# EAGLE board production (EAGLE 9.6.2)
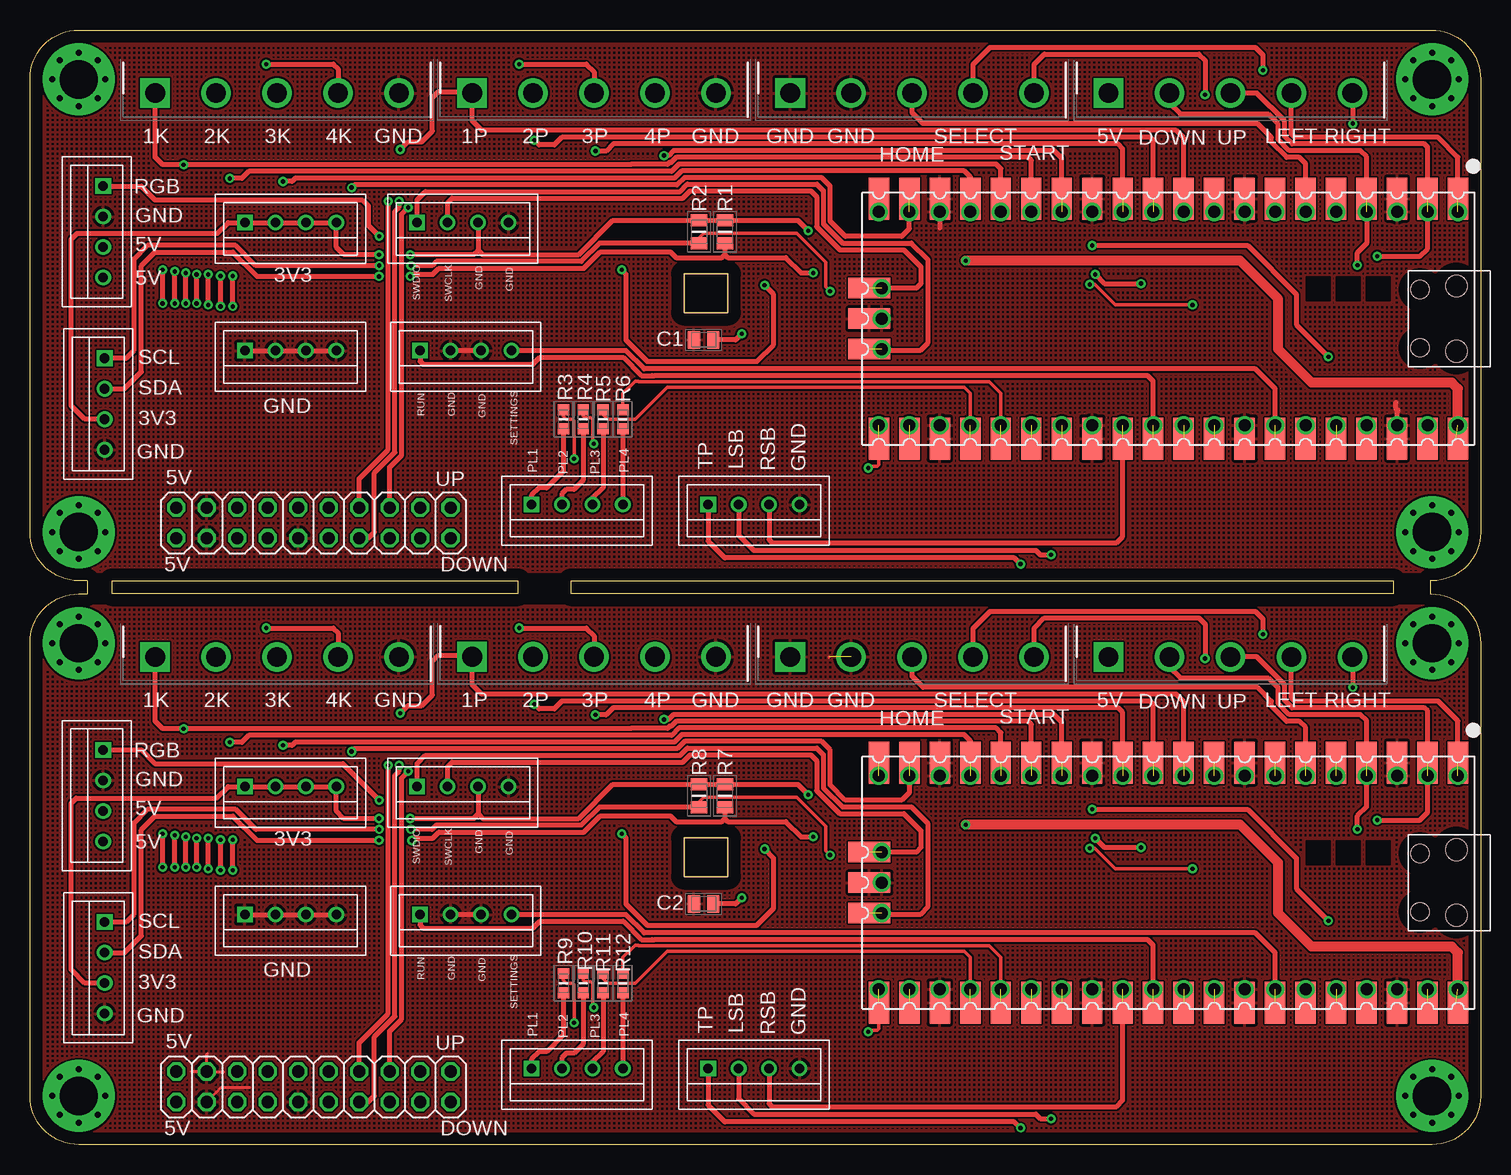
[diagram p0: board, top side]
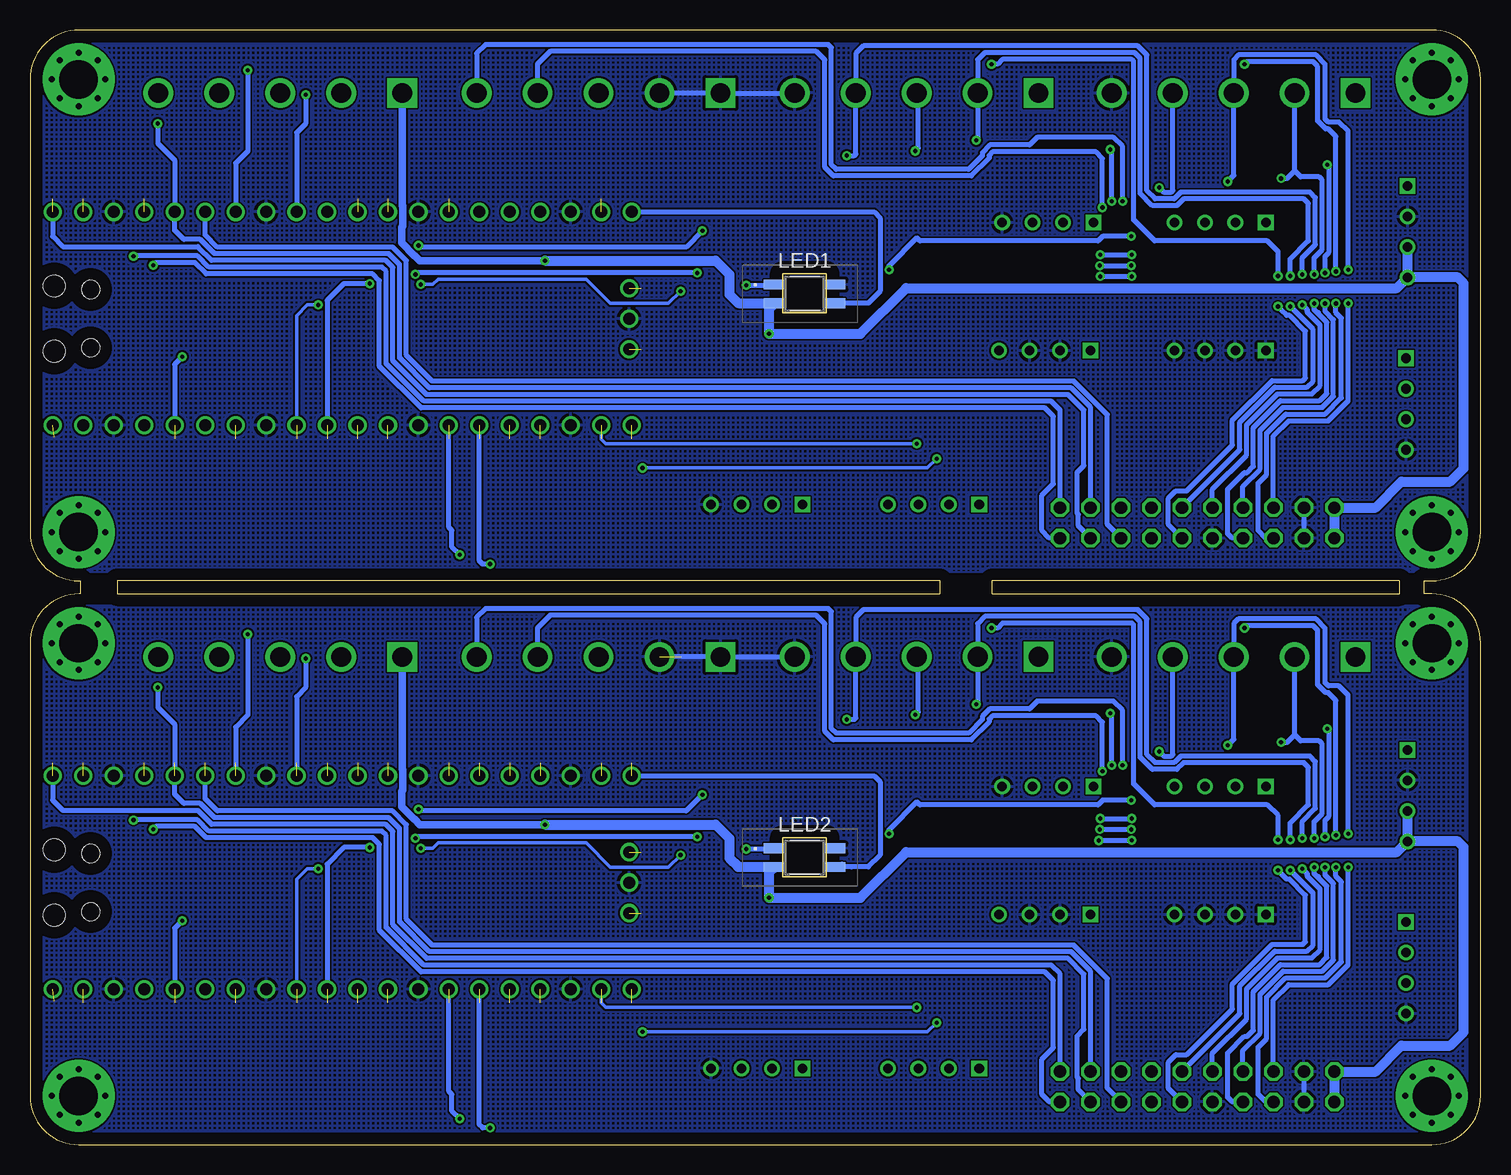
[diagram p1: board, bottom side, seen from below]

Size 120.89 x 92.89 mm. Coordinates in mm from the lower left corner, seen from the top.
Outline: 0,88.82 arc-90 4.06,92.89 116.78,92.89 arc-90 120.89,88.77 120.89,51.04 arc-90 116.84,46.99 116.7,46.99 116.7,45.9 116.78,45.9 arc-90 120.89,41.78 120.89,4.05 arc-90 116.84,0 4.06,0 arc-90 0,4.06 0,41.83 arc-90 4.06,45.9 4.76,45.9 4.76,46.99 4.06,46.99 arc-90 0,51.05 0,88.82
Outline: 6.79,46.99 40.7,46.99 40.7,45.9 6.79,45.9 6.79,46.99
Outline: 45.07,46.99 113.61,46.99 113.61,45.9 45.07,45.9 45.07,46.99
Copper layers (1*16): Top 0.035mm / dielectric 1.5mm / Bottom 0.035mm
Design rules "default *": minimum track width 12mil, minimum drill 0.35mm, track to track 6mil, track to pad 6mil, pad to pad 6mil, via to via 6mil, smd to smd 6mil, copper to edge 40mil, drill to drill 6mil, minimum pad ring 10mil, minimum via ring 8mil, stop-mask expansion 4mil, vias tented up to drill 0.36mm, thermal gap 10mil

## Footprints (pad centres in the part's own frame; a part is rotated, then mirrored left to right if it is on the bottom)
CAPC2012X94N = smd 1.02 x 1.47: 1 -0.81,0; 2 0.81,0
3MM_HOLE = drill 3.2 pad 6: P$1 0,0 | drill 0.5 pad 0.61: P$2 0,2.223; P$3 0,-2.223; P$4 2.223,0; P$5 -2.223,0; P$6 -1.587,1.587; P$7 1.587,1.587; P$8 1.587,-1.587; P$9 -1.587,-1.587
SHDRRA5W103P0X508_1X5_2540X120 = drill 1.65 pad 2.475 square: 1 0,0 | drill 1.65 pad 2.475: 2 5.08,0; 3 10.16,0; 4 15.24,0; 5 20.32,0
2X10 = drill 1.016 octagon: 1 -11.43,-1.27; 2 -11.43,1.27; 3 -8.89,-1.27; 4 -8.89,1.27; 5 -6.35,-1.27; 6 -6.35,1.27; 7 -3.81,-1.27; 8 -3.81,1.27; 9 -1.27,-1.27; 10 -1.27,1.27; 11 1.27,-1.27; 12 1.27,1.27; 13 3.81,-1.27; 14 3.81,1.27; 15 6.35,-1.27; 16 6.35,1.27; 17 8.89,-1.27; 18 8.89,1.27; 19 11.43,-1.27; 20 11.43,1.27
SK6812MINIE = smd 1.8 x 0.82: 1 -2.5,-0.774; 2 -2.5,0.774; 3 2.5,0.774; 4 2.5,-0.774
RESC2012X60N = smd 1 x 1.4: 1 -0.95,0; 2 0.95,0
RESC1608X55N = smd 0.9 x 0.95: 1 -0.8,0; 2 0.8,0
PICO-PKG = drill 1: 1 -8.89,24.13; 2 -8.89,21.59; 3 -8.89,19.05; 4 -8.89,16.51; 5 -8.89,13.97; 6 -8.89,11.43; 7 -8.89,8.89; 8 -8.89,6.35; 9 -8.89,3.81; 10 -8.89,1.27; 11 -8.89,-1.27; 12 -8.89,-3.81; 13 -8.89,-6.35; 14 -8.89,-8.89; 15 -8.89,-11.43; 16 -8.89,-13.97; 17 -8.89,-16.51; 18 -8.89,-19.05; 19 -8.89,-21.59; 20 -8.89,-24.13; 21 8.89,-24.13; 22 8.89,-21.59; 23 8.89,-19.05; 24 8.89,-16.51; 25 8.89,-13.97; 26 8.89,-11.43; 27 8.89,-8.89; 28 8.89,-6.35; 29 8.89,-3.81; 30 8.89,-1.27; 31 8.89,1.27; 32 8.89,3.81; 33 8.89,6.35; 34 8.89,8.89; 35 8.89,11.43; 36 8.89,13.97; 37 8.89,16.51; 38 8.89,19.05; 39 8.89,21.59; 40 8.89,24.13; 41 -2.54,-23.9; 42 0,-23.9; 43 2.54,-23.9 | smd 3.5 x 1.7: P$1 -10,24.13; P$2 -10,21.59; P$3 -10,19.05; P$4 -10,16.51; P$5 -10,13.97; P$6 -10,11.43; P$7 -10,8.89; P$8 -10,6.35; P$9 -10,3.81; P$10 -10,1.27; P$11 -10,-1.27; P$12 -10,-3.81; P$13 -10,-6.35; P$14 -10,-8.89; P$15 -10,-11.43; P$16 -10,-13.97; P$17 -10,-16.51; P$18 -10,-19.05; P$19 -10,-21.59; P$20 -10,-24.13; P$21 10,-24.13; P$22 10,-21.59; P$23 10,-19.05; P$24 10,-16.51; P$25 10,-13.97; P$26 10,-11.43; P$27 10,-8.89; P$28 10,-6.35; P$29 10,-3.81; P$30 10,-1.27; P$31 10,1.27; P$32 10,3.81; P$33 10,6.35; P$34 10,8.89; P$35 10,11.43; P$36 10,13.97; P$37 10,16.51; P$38 10,19.05; P$39 10,21.59; P$40 10,24.13 | smd 1.7 x 3.5: P$41 -2.54,-24.925; P$42 0,-24.925; P$43 2.54,-24.925 | hole 1.8: -2.725,24; 2.725,24 | hole 1.5: -2.425,20.97; 2.425,20.97
B4B-XH = drill 0.8 square: P$1 3.81,0 | drill 0.8: P$2 1.27,0; P$3 -1.27,0; P$4 -3.81,0

## Placement (x,y rotation side)
C1  100nf  [CAPC2012X94N]  56.13,67.06 0 top
C2  100nf  [CAPC2012X94N]  56.13,20.07 0 top
H1  3MM_HOLE  [3MM_HOLE]  4.06,51.05 0 top
H2  3MM_HOLE  [3MM_HOLE]  116.84,88.77 0 top
H3  3MM_HOLE  [3MM_HOLE]  116.84,51.05 0 top
H4  3MM_HOLE  [3MM_HOLE]  4.06,88.77 0 top
H5  3MM_HOLE  [3MM_HOLE]  4.06,4.06 0 top
H6  3MM_HOLE  [3MM_HOLE]  116.84,41.78 0 top
H7  3MM_HOLE  [3MM_HOLE]  116.84,4.06 0 top
H8  3MM_HOLE  [3MM_HOLE]  4.06,41.78 0 top
J1  1759046  [SHDRRA5W103P0X508_1X5_2540X120]  10.43,40.64 0 top
J2  1759046  [SHDRRA5W103P0X508_1X5_2540X120]  10.43,87.63 0 top
J3  1759046  [SHDRRA5W103P0X508_1X5_2540X120]  36.84,87.64 0 top
J4  1759046  [SHDRRA5W103P0X508_1X5_2540X120]  63.35,87.63 0 top
J5  1759046  [SHDRRA5W103P0X508_1X5_2540X120]  89.88,87.63 0 top
J6  1759046  [SHDRRA5W103P0X508_1X5_2540X120]  36.84,40.65 0 top
J7  1759046  [SHDRRA5W103P0X508_1X5_2540X120]  63.35,40.64 0 top
J8  1759046  [SHDRRA5W103P0X508_1X5_2540X120]  89.88,40.64 0 top
JP1  [2X10]  23.62,51.82 0 top
JP2  [2X10]  23.62,4.83 0 top
LED1  SK6812MINI-E  [SK6812MINIE]  56.35,70.9 0 bottom
LED2  SK6812MINI-E  [SK6812MINIE]  56.35,23.91 0 bottom
R1  10k  [RESC2012X60N]  57.91,76.07 270 top
R2  10k  [RESC2012X60N]  55.75,76.07 270 top
R3  330  [RESC1608X55N]  44.45,60.45 90 top
R4  330  [RESC1608X55N]  46.1,60.45 90 top
R5  330  [RESC1608X55N]  47.75,60.45 90 top
R6  330  [RESC1608X55N]  49.4,60.45 90 top
R7  10k  [RESC2012X60N]  57.91,29.08 270 top
R8  10k  [RESC2012X60N]  55.75,29.08 270 top
R9  330  [RESC1608X55N]  44.45,13.46 90 top
R10  330  [RESC1608X55N]  46.1,13.46 90 top
R11  330  [RESC1608X55N]  47.75,13.46 90 top
R12  330  [RESC1608X55N]  49.4,13.46 90 top
U1  RASPBERRY_PICOSMD-TH  [PICO-PKG]  94.87,68.83 270 top
U2  RASPBERRY_PICOSMD-TH  [PICO-PKG]  94.87,21.84 270 top
X1  04-JST-B4B-XH-A  [B4B-XH]  36.07,76.83 180 top
X2  04-JST-B4B-XH-A  [B4B-XH]  6.22,61.72 90 top
X3  04-JST-B4B-XH-A  [B4B-XH]  60.33,53.34 180 top
X4  04-JST-B4B-XH-A  [B4B-XH]  36.32,66.17 180 top
X5  04-JST-B4B-XH-A  [B4B-XH]  45.59,53.34 180 top
X6  04-JST-B4B-XH-A  [B4B-XH]  21.72,76.83 180 top
X7  04-JST-B4B-XH-A  [B4B-XH]  21.72,66.17 180 top
X8  04-JST-B4B-XH-A  [B4B-XH]  6.1,76.07 90 top
X9  04-JST-B4B-XH-A  [B4B-XH]  36.07,29.84 180 top
X10  04-JST-B4B-XH-A  [B4B-XH]  6.22,14.73 90 top
X11  04-JST-B4B-XH-A  [B4B-XH]  60.33,6.35 180 top
X12  04-JST-B4B-XH-A  [B4B-XH]  36.32,19.18 180 top
X13  04-JST-B4B-XH-A  [B4B-XH]  45.59,6.35 180 top
X14  04-JST-B4B-XH-A  [B4B-XH]  21.72,29.84 180 top
X15  04-JST-B4B-XH-A  [B4B-XH]  21.72,19.18 180 top
X16  04-JST-B4B-XH-A  [B4B-XH]  6.1,29.08 90 top

## Library data of the parts
C1 C2 = 08055C104K4T2A; DESCRIPTION: AVX - 08055C104K4T2A - SMD Multilayer Ceramic Capacitor, 0.1 F, 50 V, 0805 [2012 Metric], +/- 10%, X7R; HEIGHT: 0.94mm; MANUFACTURER_NAME: Kyocera AVX; MANUFACTURER_PART_NUMBER: 08055C104K4T2A; MOUSER_PART_NUMBER: 581-08055C104K4; MOUSER_PRICE-STOCK: https://www.mouser.co.uk/ProductDetail/KYOCERA-AVX/08055C104K4T2A?qs=xMTsDkQFXIwOG0s%252Bx1urSg%3D%3D
H1-H8 = 3mm_special_hole
J1-J8 = 1759046; DESCRIPTION: PCB header, nominal cross section: 2.5 mm?, color: green, nominal current: 12 A, rated voltage (III/2): 320 V, contact surface: Tin, type of contact: Male connector, Number of potentials: 5, Number of rows: 1, Number of positions per row: 5, number of connections: 5, product range: MSTB 2,5/..-G, pitch: 5.08 mm, mounting: Wave soldering, pin layout: Linear pinning, solder pin [P]: 3.2 mm, Stecksystem: CLASSIC COMBICON, Locking: without, type of packaging: packed in cardboard; HEIGHT: 8.72mm; MANUFACTURER_NAME: Phoenix Contact; MANUFACTURER_PART_NUMBER: 1759046; MOUSER_PART_NUMBER: 651-1759046; MOUSER_PRICE-STOCK: https://www.mouser.co.uk/ProductDetail/Phoenix-Contact/1759046?qs=cyzODkzcbwC75vUJEckceg%3D%3D
JP1 JP2 = pinhead
LED1 LED2 = SK6812MINI-E; DESCRIPTION: 3.2x2.8x1.78 mm 0.2W Intelligent external control surface mount SMD LED (MSL:5a); HEIGHT: 1.88mm; MANUFACTURER_NAME: Yellow Stone Corp.; MANUFACTURER_PART_NUMBER: SK6812MINI-E
R1 R2 R7 R8 = CHP0805-FX-1002ELF; DESCRIPTION: Thick Film Resistors - SMD ResHighPower 0805 10k 1% 1/2W TC100; HEIGHT: 0.6mm; MANUFACTURER_NAME: Bourns; MANUFACTURER_PART_NUMBER: CHP0805-FX-1002ELF; MOUSER_PART_NUMBER: 652-CHP0805FX1002ELF; MOUSER_PRICE-STOCK: https://www.mouser.co.uk/ProductDetail/Bourns/CHP0805-FX-1002ELF?qs=lc2O%252BfHJPVaDI6gsPdDtfw%3D%3D
R3-R6 R9-R12 = CMP0603AFX-3300ELF; DESCRIPTION: Thick Film Resistors - SMD 330 OHM 1% 1/4W TC100; HEIGHT: 0.55mm; MANUFACTURER_NAME: Bourns; MANUFACTURER_PART_NUMBER: CMP0603AFX-3300ELF; MOUSER_PART_NUMBER: 652-CMP0603AFX-3300L; MOUSER_PRICE-STOCK: https://www.mouser.co.uk/ProductDetail/Bourns/CMP0603AFX-3300ELF?qs=TiOZkKH1s2QD9kDdDwF%252BdA%3D%3D
U1 U2 = RpiPico
X1-X16 = bt_con-jst-xh

## Nets
1K: J2.1 JP1.8 U1.15 U1.P$15
1K1: J1.1 JP2.8 U2.15 U2.P$15
1P: J3.1 JP1.13 U1.10 U1.P$10
1P1: J6.1 JP2.13 U2.10 U2.P$10
2K: J2.2 JP1.7 U1.16 U1.P$16
2K1: J1.2 JP2.7 U2.16 U2.P$16
2P: J3.2 JP1.12 U1.11 U1.P$11
2P1: J6.2 JP2.12 U2.11 U2.P$11
3K: J2.3 JP1.6 U1.17 U1.P$17
3K1: J1.3 JP2.6 U2.17 U2.P$17
3P: J3.3 JP1.11 U1.12 U1.P$12
3P1: J6.3 JP2.11 U2.12 U2.P$12
4K: J2.4 JP1.5 U1.19 U1.P$19
4K1: J1.4 JP2.5 U2.19 U2.P$19
4P: J3.4 JP1.10 U1.14 U1.P$14
4P1: J6.4 JP2.10 U2.14 U2.P$14
+3V1: R7.1 R8.1 U2.36 U2.P$36 X9.P$3 X10.P$3 X14.P$1 X14.P$2 X14.P$3 X14.P$4
+3V3: R1.1 R2.1 U1.36 U1.P$36 X1.P$3 X2.P$3 X6.P$1 X6.P$2 X6.P$3 X6.P$4
+5V: C1.2 J5.1 JP1.1 JP1.2 LED1.1 U1.40 U1.P$40 X8.P$3 X8.P$4
+5V1: C2.2 J8.1 JP2.1 JP2.2 LED2.1 U2.40 U2.P$40 X16.P$3 X16.P$4
DOWN: J5.2 JP1.19 U1.4 U1.P$4
DOWN1: J8.2 JP2.19 U2.4 U2.P$4
GND: C1.1 J2.5 J3.5 J4.1 J4.2 JP1.3 JP1.4 JP1.9 LED1.3 U1.3 U1.8 U1.13 U1.18 U1.23 U1.28 U1.33 U1.38 U1.42 U1.P$3 U1.P$8 U1.P$13 U1.P$18 U1.P$23 U1.P$28 U1.P$33 U1.P$38 U1.P$42 X1.P$4 X2.P$4 X3.P$4 X4.P$2 X4.P$3 X7.P$1 X7.P$2 X7.P$3 X7.P$4 X8.P$2
GND1: C2.1 J1.5 J6.5 J7.1 J7.2 JP2.3 JP2.4 JP2.9 LED2.3 U2.3 U2.8 U2.13 U2.18 U2.23 U2.28 U2.33 U2.38 U2.42 U2.P$3 U2.P$8 U2.P$13 U2.P$18 U2.P$23 U2.P$28 U2.P$33 U2.P$38 U2.P$42 X9.P$4 X10.P$4 X11.P$4 X12.P$2 X12.P$3 X15.P$1 X15.P$2 X15.P$3 X15.P$4 X16.P$2
HOME: J4.3 JP1.15 U1.6 U1.P$6
HOME1: J7.3 JP2.15 U2.6 U2.P$6
LEFT: J5.4 JP1.17 U1.1 U1.P$1
LEFT1: J8.4 JP2.17 U2.1 U2.P$1
LSB: U1.27 U1.P$27 X3.P$2
LSB1: U2.27 U2.P$27 X11.P$2
N$1: R9.1 X13.P$1
N$2: R10.1 X13.P$2
N$3: R11.1 X13.P$3
N$4: R12.1 X13.P$4
N$21: R3.1 X5.P$1
N$22: R4.1 X5.P$2
N$23: R5.1 X5.P$3
N$24: R6.1 X5.P$4
PLED1: R3.2 U1.21 U1.P$21
PLED2: R4.2 U1.22 U1.P$22
PLED3: R5.2 U1.24 U1.P$24
PLED4: R6.2 U1.25 U1.P$25
PLED5: R9.2 U2.21 U2.P$21
PLED6: R10.2 U2.22 U2.P$22
PLED7: R11.2 U2.24 U2.P$24
PLED8: R12.2 U2.25 U2.P$25
RGB: LED1.4 U1.20 U1.P$20
RGB1: LED2.4 U2.20 U2.P$20
RGBOUT: LED1.2 X8.P$1
RGBOUT1: LED2.2 X16.P$1
RIGHT: J5.5 JP1.18 U1.5 U1.P$5
RIGHT1: J8.5 JP2.18 U2.5 U2.P$5
RSB: U1.29 U1.P$29 X3.P$3
RSB1: U2.29 U2.P$29 X11.P$3
RUN: U1.30 U1.P$30 X4.P$1
RUN1: U2.30 U2.P$30 X12.P$1
SCL: R2.2 U1.32 U1.P$32 X2.P$1
SCL1: R8.2 U2.32 U2.P$32 X10.P$1
SDA: R1.2 U1.31 U1.P$31 X2.P$2
SDA1: R7.2 U2.31 U2.P$31 X10.P$2
SELECT: J4.4 JP1.16 U1.7 U1.P$7
SELECT1: J7.4 JP2.16 U2.7 U2.P$7
SETTINGS: U1.34 U1.P$34 X4.P$4
SETTINGS1: U2.34 U2.P$34 X12.P$4
START: J4.5 JP1.14 U1.9 U1.P$9
START1: J7.5 JP2.14 U2.9 U2.P$9
SWCLK: U1.41 U1.P$41 X1.P$2
SWCLK1: U2.41 U2.P$41 X9.P$2
SWDIO: U1.43 U1.P$43 X1.P$1
SWDIO1: U2.43 U2.P$43 X9.P$1
TP: U1.26 U1.P$26 X3.P$1
TP1: U2.26 U2.P$26 X11.P$1
UP: J5.3 JP1.20 U1.2 U1.P$2
UP1: J8.3 JP2.20 U2.2 U2.P$2
VSYS: U1.39 U1.P$39
VSYS1: U2.39 U2.P$39

## Tracks (layer width: path | path; a pad name or v marks a point on that pad's centre or on a via)
1K  (via drill 0.35)
  Top 0.254: U1.P$15 U1.15
  Top 0.406: U1.P$15 83.44,82.02 83.19,82.27 53.85,82.27 53.44,81.86 53.31,81.86 53.14,81.69 50.07,81.69 50.04,81.66 v12.8,81.66 11.05,81.66 10.43,82.28 J2.1 | v12.97,70.1 v12.97,72.64
  Bottom 0.406: JP1.8 19.81,54.86 18.39,56.29 18.39,59.52 16.47,61.44 13.19,61.44 12.27,62.36 12.27,68.76 12.97,69.46 v12.97,70.1 | v12.97,72.64 12.97,74.02 12.62,74.37 12.62,81.49 v12.8,81.66
1K1  (via drill 0.35)  (1 unrouted)
  Top 0.406: U2.P$15 83.44,35.03 83.19,35.28 53.85,35.28 53.44,34.87 53.31,34.87 53.14,34.7 50.07,34.7 50.04,34.67 v12.8,34.67 11.05,34.67 10.43,35.29 J1.1 | v12.97,23.11 v12.97,25.65
  Bottom 0.406: JP2.8 19.81,7.87 18.39,9.3 18.39,12.53 16.47,14.45 13.19,14.45 12.27,15.37 12.27,21.77 12.97,22.47 v12.97,23.11 | v12.97,25.65 12.97,27.03 12.62,27.38 12.62,34.5 v12.8,34.67
1P  (via drill 0.35)
  Top 0.152: 96.14,79.43 U1.P$10 U1.10
  Top 0.406: 96.14,79.43 96.14,83.9 95.5,84.53 37.64,84.53 36.84,85.33 J3.1 36.73,87.76 34.04,87.76 33.53,87.25 33.53,84.45 32.64,83.57 31.5,83.57 v30.86,82.93 | JP1.13 28.19,50.55 28.7,51.05 28.7,55.98 30.4,57.68 30.4,77.78 30.75,78.12 v30.75,78.61
  Bottom 0.406: v30.86,82.93 30.75,82.82 v30.75,78.61
1P1  (via drill 0.35)  (1 unrouted)
  Top 0.406: U2.P$10 96.14,36.91 95.5,37.54 37.64,37.54 36.84,38.34 J6.1 36.73,40.77 34.04,40.77 33.53,40.26 33.53,37.47 32.64,36.58 31.5,36.58 v30.86,35.94 | JP2.13 28.19,3.56 28.7,4.06 28.7,8.99 30.4,10.69 30.4,30.78 30.75,31.13 v30.75,31.62
  Bottom 0.406: v30.86,35.94 30.75,35.83 v30.75,31.62
2K  (via drill 0.35)
  Top 0.254: U1.P$16 U1.16
  Top 0.406: U1.P$16 80.9,81.33 80.52,81.71 54.08,81.71 53.47,81.1 18.24,81.1 17.65,80.52 v16.64,80.52 | v13.88,70.1 v13.88,72.52
  Bottom 0.406: v16.64,80.52 16.13,80.52 15.51,81.14 | 15.51,81.14 J2.2 | JP1.7 20.7,50.55 21.08,50.93 21.08,54.61 19.69,56.01 19.46,56.01 18.95,56.52 18.95,59.75 16.7,62 13.42,62 12.83,62.59 12.83,68.53 13.53,69.23 | 13.53,69.23 13.53,69.34 | 13.53,69.23 13.88,69.58 v13.88,70.1 | v13.88,72.52 13.88,73.9 13.21,74.58 13.21,80.39 13.46,80.64 15.01,80.64 15.51,81.14
2K1  (via drill 0.35)  (1 unrouted)
  Top 0.406: U2.P$16 80.9,34.34 80.52,34.72 54.08,34.72 53.47,34.11 18.24,34.11 17.65,33.53 v16.64,33.53 | v13.88,23.11 v13.88,25.53
  Bottom 0.406: v16.64,33.53 16.13,33.53 15.51,34.15 | 15.51,34.15 J1.2 | JP2.7 20.7,3.56 21.08,3.94 21.08,7.62 19.69,9.02 19.46,9.02 18.95,9.53 18.95,12.76 16.7,15.01 13.42,15.01 12.83,15.6 12.83,21.54 13.53,22.24 | 13.53,22.24 13.53,22.35 | 13.53,22.24 13.88,22.59 v13.88,23.11 | v13.88,25.53 13.88,26.91 13.21,27.59 13.21,33.4 13.46,33.66 15.01,33.66 15.51,34.15
2P  (via drill 0.35)  (1 unrouted)
  Top 0.406: U1.P$11 93.6,83.69 93.35,83.95 44.32,83.95 43.69,83.31 42.42,83.31 v42.04,83.69 | v15.88,69.85 v15.88,72.39
  Bottom 0.406: v42.04,83.69 41.92,83.81 J3.2 41.92,90.41 41.33,91.01 28.83,91.01 28.37,90.55 28.37,79.27 27.36,78.26 25.32,78.26 24.76,78.82 14.73,78.82 14.35,78.44 14.35,75.31 15.88,73.79 v15.88,72.39 | JP1.12 20.07,57.91 20.07,60.21 17.16,63.12 14.48,63.12 13.97,63.63 13.97,67.94 v15.88,69.85
2P1  (via drill 0.35)  (1 unrouted)
  Top 0.406: U2.P$11 93.6,36.7 93.35,36.96 44.32,36.96 43.69,36.32 42.42,36.32 v42.04,36.7 | v15.88,22.86 v15.88,25.4
  Bottom 0.406: v42.04,36.7 41.92,36.82 J6.2 41.92,43.42 41.33,44.02 28.83,44.02 28.37,43.56 28.37,32.28 27.36,31.27 25.32,31.27 24.76,31.83 14.73,31.83 14.35,31.45 14.35,28.32 15.88,26.8 v15.88,25.4 | JP2.12 20.07,10.92 20.07,13.22 17.16,16.13 14.48,16.13 13.97,16.64 13.97,20.95 v15.88,22.86
3K  (via drill 0.35)
  Top 0.254: U1.P$17 U1.17
  Top 0.406: U1.P$17 78.36,80.64 77.85,81.15 54.31,81.15 53.7,80.54 22.12,80.54 21.84,80.26 v21.08,80.26 | v11.05,70.1 v11.05,72.9
  Bottom 0.406: v21.08,80.26 20.57,80.77 20.57,87.62 | 20.57,87.62 J2.3 | JP1.6 17.27,59.05 16,60.33 12.7,60.33 11.05,61.98 v11.05,70.1 | v11.05,72.9 11.05,84.45 11.81,85.22 12.7,85.22 12.95,85.47 12.95,90.04 13.72,90.8 20.19,90.8 20.57,90.42 20.57,87.62
3K1  (via drill 0.35)  (1 unrouted)
  Top 0.406: U2.P$17 78.36,33.66 77.85,34.16 54.31,34.16 53.7,33.55 22.12,33.55 21.84,33.27 v21.08,33.27 | v11.05,23.11 v11.05,25.91
  Bottom 0.406: v21.08,33.27 20.57,33.78 20.57,40.63 | 20.57,40.63 J1.3 | JP2.6 17.27,12.06 16,13.33 12.7,13.33 11.05,14.99 v11.05,23.11 | v11.05,25.91 11.05,37.47 11.81,38.23 12.7,38.23 12.95,38.48 12.95,43.05 13.72,43.81 20.19,43.81 20.57,43.43 20.57,40.63
3P  (via drill 0.35)  (1 unrouted)
  Top 0.406: U1.P$12 91.06,83.01 90.68,83.39 48.59,83.39 48.01,82.8 v47.12,82.8 | v16.89,69.85 v16.89,72.39 | v40.77,90.04 46.36,90.04 47,89.39 J3.3
  Bottom 0.406: v47.12,82.8 46.86,83.06 46.86,87.5 J3.3 | JP1.11 26.03,51.69 26.03,53.85 25.4,54.48 24.51,54.48 20.7,58.29 20.7,60.37 17.39,63.68 14.81,63.68 14.6,63.88 14.6,67.79 15.93,69.12 16.18,69.12 16.61,69.55 16.61,69.57 v16.89,69.85 | v16.89,72.39 16.89,74.42 17.78,75.31 27.18,75.31 28.93,77.06 28.93,90.32 29.06,90.45 39.85,90.45 40.26,90.04 v40.77,90.04
3P1  (via drill 0.35)  (1 unrouted)
  Top 0.406: U2.P$12 91.06,36.02 90.68,36.4 48.59,36.4 48.01,35.81 v47.12,35.81 | v16.89,22.86 v16.89,25.4 | v40.77,43.05 46.36,43.05 47,42.41 J6.3
  Bottom 0.406: v47.12,35.81 46.86,36.07 46.86,40.51 J6.3 | JP2.11 26.03,4.7 26.03,6.86 25.4,7.49 24.51,7.49 20.7,11.3 20.7,13.38 17.39,16.69 14.81,16.69 14.6,16.89 14.6,20.8 15.93,22.13 16.18,22.13 16.61,22.56 16.61,22.58 v16.89,22.86 | v16.89,25.4 16.89,27.43 17.78,28.32 27.18,28.32 28.93,30.07 28.93,43.33 29.06,43.46 39.85,43.46 40.26,43.05 v40.77,43.05
4K  (via drill 0.35)  (1 unrouted)
  Top 0.406: v26.8,79.76 27.03,79.98 53.94,79.98 54.55,80.59 65.96,80.59 66.67,79.88 66.67,76.96 67.95,75.69 72.64,75.69 73.28,76.33 U1.19 | v12.06,70.1 v12.06,72.77 | v19.69,90.04 25.27,90.04 25.67,89.65 J2.4 | U1.P$19 73.39,78.73 73.9,78.73
  Bottom 0.406: v26.8,79.76 26.42,79.38 25.78,79.38 25.65,79.5 25.65,87.62 J2.4 | JP1.5 17.91,50.55 18.54,51.18 18.54,55.12 17.83,55.83 17.83,59.29 16.23,60.88 12.95,60.88 11.61,62.23 11.61,68.89 12.06,69.34 v12.06,70.1 | v12.06,72.77 12.06,84.02 12.7,84.66 12.93,84.66 13.59,85.32 13.59,89.86 13.97,90.25 19.48,90.25 v19.69,90.04
4K1  (via drill 0.35)  (1 unrouted)
  Top 0.406: U2.P$19 73.28,29.34 72.64,28.7 67.95,28.7 66.67,29.97 66.67,32.89 65.96,33.6 54.55,33.6 53.94,32.99 27.03,32.99 v26.8,32.77 | v12.06,23.11 v12.06,25.78 | v19.69,43.05 25.27,43.05 25.67,42.66 J1.4
  Bottom 0.406: v26.8,32.77 26.42,32.38 25.78,32.38 25.65,32.51 25.65,40.63 J1.4 | JP2.5 17.91,3.56 18.54,4.19 18.54,8.13 17.83,8.84 17.83,12.3 16.23,13.89 12.95,13.89 11.61,15.24 11.61,21.89 12.06,22.35 v12.06,23.11 | v12.06,25.78 12.06,37.03 12.7,37.67 12.93,37.67 13.59,38.33 13.59,42.88 13.97,43.26 19.48,43.26 v19.69,43.05
4P  (via drill 0.35)  (1 unrouted)
  Top 0.406: U1.P$14 85.98,82.19 85.34,82.83 53.62,82.83 53.21,82.42 v52.83,82.42 | v14.86,69.98 v14.86,72.52
  Bottom 0.406: v52.83,82.42 52.2,82.42 52.07,82.55 52.07,87.38 52.07,87.63 | 52.07,87.63 J3.4 | JP1.10 22.35,54.61 19.51,57.45 19.51,59.98 16.93,62.56 14.07,62.56 13.39,63.25 13.39,68.29 14.44,69.35 14.44,69.56 v14.86,69.98 | v14.86,72.52 14.86,73.91 13.77,75.01 13.77,78.92 14.22,79.38 24.99,79.38 25.55,78.82 27.13,78.82 27.81,79.5 27.81,90.8 28.58,91.57 51.44,91.57 52.07,90.93 52.07,87.63
4P1  (via drill 0.35)  (1 unrouted)
  Top 0.406: U2.P$14 85.98,35.2 85.34,35.84 53.62,35.84 53.21,35.43 v52.83,35.43 | v14.86,22.99 v14.86,25.53
  Bottom 0.406: v52.83,35.43 52.2,35.43 52.07,35.56 52.07,40.39 52.07,40.64 | 52.07,40.64 J6.4 | JP2.10 22.35,7.62 19.51,10.46 19.51,12.99 16.93,15.57 14.07,15.57 13.39,16.26 13.39,21.3 14.44,22.36 14.44,22.57 v14.86,22.99 | v14.86,25.53 14.86,26.92 13.77,28.02 13.77,31.93 14.22,32.38 24.99,32.38 25.55,31.83 27.13,31.83 27.81,32.51 27.81,43.81 28.58,44.58 51.44,44.58 52.07,43.94 52.07,40.64
+3V1  (via drill 0.35)  (1 unrouted)
  Top 0.406: X9.P$3 37.34,27.56 | v31.7,27.18 36.96,27.18 37.34,27.56 | v29.08,27.18 26.16,27.18 25.53,27.81 X14.P$4 X14.P$3 X14.P$2 X14.P$1 16.51,29.84 15.53,28.87 3.85,28.87 3.43,28.45 3.43,14.6 4.57,13.46 X10.P$3 | 37.34,27.56 37.72,27.18 45.72,27.18 48.58,30.03 R8.1 R7.1 64,30.03 v64.86,29.17 | v88.52,27.94 101.47,27.94 105.54,23.88 105.54,21.34 v108.2,18.67
  Bottom 0.406: v31.7,27.18 v29.08,27.18 | v64.86,29.17 66.22,27.81 88.39,27.81 v88.52,27.94 | v108.2,18.67 108.84,18.03 U2.36
+3V3  (via drill 0.35)  (1 unrouted)
  Top 0.406: X1.P$3 37.34,74.55 | v31.7,74.17 36.96,74.17 37.34,74.55 | v29.08,74.17 26.16,74.17 25.53,74.8 X6.P$4 X6.P$3 X6.P$2 X6.P$1 16.51,76.83 15.62,75.95 3.94,75.95 3.43,75.44 3.43,61.59 4.57,60.45 X2.P$3 | 37.34,74.55 37.72,74.17 45.72,74.17 48.58,77.02 R2.1 R1.1 64,77.02 v64.86,76.16 | v88.52,74.93 101.47,74.93 105.54,70.87 105.54,68.33 v108.2,65.66
  Bottom 0.406: v31.7,74.17 v29.08,74.17 | v64.86,76.16 66.22,74.8 88.39,74.8 v88.52,74.93 | v108.2,65.66 108.84,65.02 U1.36
+5V  (via drill 0.35)  (1 unrouted)
  Top 0.406: v59.31,67.56 58.8,67.06 C1.2 | 118.87,58.96 U1.P$40 119,60.33
  Top 0.813: 119,60.33 119,62.99 118.49,63.5 106.81,63.5 104.01,66.29 104.01,70.48 100.84,73.66 v77.98,73.66
  Bottom 0.61: J5.1 89.88,78.26 89.85,78.23 89.85,76.52 89.92,76.45 89.92,75.15 88.86,74.09 88.83,74.09 88.39,73.66 v77.98,73.66
  Bottom 0.813: v77.98,73.66 63.75,73.66 62.61,72.52 62.61,70.87 61.88,70.13 LED1.1 59.31,69.67 v59.31,67.56 51.69,67.56 47.88,71.37 6.98,71.37 X8.P$4 | X8.P$4 X8.P$3 | JP1.1 JP1.2 8.76,53.09 6.6,55.25 2.54,55.25 1.42,56.36 1.42,71.78 1.91,72.26 X8.P$4
+5V1  (via drill 0.35)  (1 unrouted)
  Top 0.406: v59.31,20.57 58.8,20.07 C2.2 | 118.87,11.97 U2.P$40
  Top 0.813: U2.P$40 119,16 118.49,16.51 106.81,16.51 104.01,19.3 104.01,23.49 100.84,26.67 v77.98,26.67
  Bottom 0.61: J8.1 89.88,31.27 89.85,31.24 89.85,29.53 89.92,29.46 89.92,28.16 88.86,27.1 88.83,27.1 88.39,26.67 v77.98,26.67
  Bottom 0.813: v77.98,26.67 63.75,26.67 62.61,25.53 62.61,23.88 61.88,23.14 LED2.1 59.31,22.68 v59.31,20.57 51.69,20.57 47.88,24.38 6.98,24.38 X16.P$4 | X16.P$4 X16.P$3 | JP2.1 JP2.2 8.76,6.1 6.6,8.25 2.54,8.25 1.42,9.37 1.42,24.79 1.91,25.27 X16.P$4
DOWN  (via drill 0.35)  (1 unrouted)
  Top 0.406: U1.P$4 111.38,82.32 110.87,82.83 104.95,82.83 104,83.78 104,85.07 103.22,85.85 95.89,85.85 94.96,86.78 J5.2 | v110.62,73.28 110.62,74.33 111.39,75.11 111.39,77.71 U1.4
  Bottom 0.406: JP1.19 35.94,50.55 36.58,51.18 36.58,54.1 35.61,55.07 35.61,60.68 36.32,61.39 88.3,61.39 91.77,64.86 91.77,72.01 92.33,72.57 106.21,72.57 107.14,73.5 110.39,73.5 v110.62,73.28
DOWN1  (via drill 0.35)  (1 unrouted)
  Top 0.406: U2.P$4 111.38,35.33 110.87,35.84 104.95,35.84 104,36.79 104,38.08 103.22,38.86 95.89,38.86 94.96,39.79 J8.2 | v110.62,26.29 110.62,27.39 111.38,28.16 U2.4
  Bottom 0.406: JP2.19 35.94,3.56 36.58,4.19 36.58,7.11 35.61,8.08 35.61,13.69 36.32,14.4 88.3,14.4 91.77,17.87 91.77,25.02 92.33,25.58 106.21,25.58 107.14,26.51 110.39,26.51 v110.62,26.29
GND
  Top 0.254: U1.P$18 U1.18
  Top 0.406: X4.P$3 X4.P$2 | X7.P$4 X7.P$3 X7.P$2 X7.P$1 | U1.P$18 75.82,76.42 75.84,76.39 | U1.38 U1.P$38 113.92,61.07 114.02,61.18 113.83,61.37 113.83,61.85 113.84,61.85
  Bottom 0.406: J4.2 J4.1 57.17,87.63 J3.5 | JP1.4 JP1.3
  pour Top (hatched): -1.78,95.1 123.32,95.1 123.32,47.75 -1.78,47.75
  pour Bottom (hatched): -1.78,94.41 123.32,94.41 123.32,47.75 -1.78,47.75
GND1  (1 unrouted)
  Top 0.254: 66.61,40.64 66.6,40.63 66.6,40.61 | JP2.4 14.73,7.53 14.78,7.58 | JP2.4 13.42,6.1 13.41,6.11 | JP2.4 16.1,6.1 16.13,6.07 | JP2.3 15.95,4.77 18.35,4.77
  Top 0.406: X12.P$3 X12.P$2 | X15.P$4 X15.P$3 X15.P$2 X15.P$1
  Bottom 0.406: J7.2 J7.1 57.17,40.64 J6.5 | JP2.4 JP2.3
  pour Top (hatched): -1.19,44.91 123.23,44.91 123.23,-0.84 -1.19,-0.84
  pour Bottom (hatched): 121.74,44.89 121.74,-0.5 -0.43,-0.5 -0.43,44.89
HOME
  Top 0.152: U1.P$6 U1.6
  Top 0.406: U1.P$6 106.3,81.76 105.79,82.27 104.72,82.27 103.44,83.55 103.44,83.95 102.3,85.09 74.42,85.09 73.51,86 J4.3
  Bottom 0.406: JP1.15 31.11,51.69 31.11,60.83 33.91,63.63 87.38,63.63 89.54,65.79 89.54,73.66 90.68,74.8 105.28,74.8 106.3,75.82 U1.6
HOME1  (1 unrouted)
  Top 0.406: U2.P$6 106.3,34.77 105.79,35.28 104.72,35.28 103.44,36.55 103.44,36.96 102.3,38.1 74.42,38.1 73.51,39.01 J7.3
  Bottom 0.406: JP2.15 31.11,4.7 31.11,13.84 33.91,16.64 87.38,16.64 89.54,18.8 89.54,26.67 90.68,27.81 105.28,27.81 106.3,28.83 U2.6
LEFT  (1 unrouted)
  Top 0.406: U1.P$1 119,82.3 117.35,83.95 105.41,83.95 105.12,84.24 J5.4
  Bottom 0.406: JP1.17 33.53,51.56 33.53,52.52 33.63,52.62 33.63,56.03 33.07,56.59 33.07,61.21 34.37,62.51 87.84,62.51 90.65,65.32 90.65,73.1 91.24,73.69 105.75,73.69 106.9,74.84 118.14,74.84 119,75.69 U1.1
LEFT1  (1 unrouted)
  Top 0.406: U2.P$1 119,35.31 117.35,36.96 105.41,36.96 105.12,37.25 J8.4
  Bottom 0.406: JP2.17 33.53,4.57 33.53,5.53 33.63,5.63 33.63,9.04 33.07,9.6 33.07,14.22 34.37,15.52 87.84,15.52 90.65,18.33 90.65,26.11 91.24,26.7 105.75,26.7 106.9,27.85 118.14,27.85 119,28.7 U2.1
LSB  (via drill 0.35)  (1 unrouted)
  Top 0.406: X3.P$2 59.06,50.8 60.33,49.53 83.82,49.53 84.2,49.15 v85.09,49.15
  Bottom 0.406: v85.09,49.15 85.72,49.78 85.72,51.18 85.98,51.44 U1.27
LSB1  (via drill 0.35)  (1 unrouted)
  Top 0.406: X11.P$2 59.06,3.81 60.33,2.54 83.82,2.54 84.2,2.16 v85.09,2.16
  Bottom 0.406: v85.09,2.16 85.72,2.79 85.72,4.19 85.98,4.44 U2.27
N$1
  Top 0.406: R9.1 44.45,9.14 43.05,7.75 42.42,7.75 41.78,7.11 X13.P$1
N$2
  Top 0.406: R10.1 46.1,8.38 45.34,7.62 44.7,7.62 44.32,7.24 X13.P$2
N$3
  Top 0.406: R11.1 47.75,7.75 46.86,6.86 X13.P$3
N$4
  Top 0.406: R12.1 X13.P$4
N$21
  Top 0.406: R3.1 44.45,56.13 43.05,54.74 42.42,54.74 41.78,54.1 X5.P$1
N$22
  Top 0.406: R4.1 46.1,55.37 45.34,54.61 44.7,54.61 44.32,54.23 X5.P$2
N$23
  Top 0.406: R5.1 47.75,54.74 46.86,53.85 X5.P$3
N$24
  Top 0.406: R6.1 X5.P$4
PLED1  (via drill 0.35)  (1 unrouted)
  Top 0.305: U1.P$21 70.74,56.64 70.61,56.52 69.85,56.52 v69.85,56.39 | v45.34,57.15 45.34,59.06 45.32,59.08 45.32,60.34 45.21,60.45 44.7,60.45 44.45,60.71 R3.2
  Bottom 0.305: v69.85,56.39 46.1,56.39 v45.34,57.15
PLED2  (via drill 0.35)  (1 unrouted)
  Top 0.305: R4.2 46.1,60.71 46.23,60.58 46.74,60.58 46.88,60.43 46.88,58.53 v46.99,58.42
  Bottom 0.305: v46.99,58.42 72.9,58.42 73.28,58.8 U1.22
PLED3  (1 unrouted)
  Top 0.305: U1.P$24 78.36,62.61 77.85,63.12 53.09,63.12 50.42,60.45 48.13,60.45 47.75,60.83 R5.2
PLED4  (1 unrouted)
  Top 0.305: U1.P$25 80.9,62.61 79.93,63.58 50.74,63.58 50.69,63.63 50.42,63.63 49.4,62.61 R6.2
PLED5  (via drill 0.35)  (1 unrouted)
  Top 0.305: U2.P$21 70.74,9.65 70.61,9.52 69.85,9.52 v69.85,9.4 | v45.34,10.16 45.34,12.07 45.32,12.09 45.32,13.35 45.21,13.46 44.7,13.46 44.45,13.72 R9.2
  Bottom 0.305: v69.85,9.4 46.1,9.4 v45.34,10.16
PLED6  (via drill 0.35)  (1 unrouted)
  Top 0.305: R10.2 46.1,13.72 46.23,13.59 46.74,13.59 46.88,13.44 46.88,11.54 v46.99,11.43
  Bottom 0.305: v46.99,11.43 72.9,11.43 73.28,11.81 U2.22
PLED7  (1 unrouted)
  Top 0.305: U2.P$24 78.36,15.62 77.85,16.13 53.09,16.13 50.42,13.46 48.13,13.46 47.75,13.84 R11.2
PLED8  (1 unrouted)
  Top 0.305: U2.P$25 80.9,15.62 79.93,16.59 50.74,16.59 50.69,16.64 50.42,16.64 49.4,15.62 R12.2
RGB
  Top 0.406: U1.P$20 U1.20
  Bottom 0.152: 53.24,70.36 53.19,70.36 52.96,70.13 LED1.4
  Bottom 0.406: U1.20 50.55,77.72 50.04,77.22 50.04,71.12 51.03,70.13 52.96,70.13 53.24,70.13 53.24,70.36
RGB1  (1 unrouted)
  Bottom 0.152: 53.24,23.37 53.19,23.37 52.96,23.14 53.36,23.14 LED2.4
  Bottom 0.406: U2.20 50.55,30.73 50.04,30.23 50.04,24.13 51.03,23.14 52.45,23.14 52.96,23.14 53.24,23.14 53.24,23.37
RGBOUT  (via drill 0.35)
  Top 0.406: X8.P$1 9.27,79.88 10.41,78.74 27.69,78.74 28.19,78.23 28.19,76.61 v29.11,75.69 | v49.3,72.9 49.66,72.55 49.66,67.06 51.44,65.28 60.58,65.28 61.98,66.67 61.98,70.87 v61.21,71.63
  Bottom 0.305: 59.43,71.53 59.38,71.58 59.38,71.68 59.43,71.63 | LED1.2 59.43,71.68
  Bottom 0.406: v29.11,75.69 31.5,75.69 31.88,75.31 46.74,75.31 46.99,75.56 49.3,73.25 v49.3,72.9 | v61.21,71.63 59.48,71.63 59.43,71.68 59.43,71.63
RGBOUT1  (via drill 0.35)
  Top 0.406: X16.P$1 9.27,32.89 10.41,31.75 26.06,31.75 v29.11,28.7 | v49.3,25.91 49.66,25.55 49.66,20.07 51.44,18.29 60.58,18.29 61.98,19.68 61.98,23.88 v61.21,24.64
  Bottom 0.305: 59.43,24.54 59.38,24.59 59.38,24.69 59.43,24.64 | LED2.2 59.43,24.69
  Bottom 0.406: v29.11,28.7 31.5,28.7 31.88,28.32 46.74,28.32 46.99,28.57 49.3,26.26 v49.3,25.91 | v61.21,24.64 59.48,24.64 59.43,24.69 59.43,24.64
RIGHT  (via drill 0.35)
  Top 0.152: U1.P$5 U1.5
  Top 0.406: J5.5 110.24,87.59 v110.24,85.09
  Bottom 0.406: v110.24,85.09 110.24,83.44 108.84,82.04 U1.5 108.84,76.2 108.08,75.44 106.71,75.44 105.51,74.24 91.01,74.24 90.09,73.33 90.09,65.55 87.61,63.07 34.14,63.07 32.51,61.44 JP1.18
RIGHT1  (via drill 0.35)  (1 unrouted)
  Top 0.406: J8.5 110.24,40.6 v110.24,38.1
  Bottom 0.406: v110.24,38.1 110.24,36.45 108.84,35.05 U2.5 108.84,29.21 108.08,28.45 106.71,28.45 105.51,27.25 91.01,27.25 90.09,26.34 90.09,18.56 87.61,16.08 34.14,16.08 32.51,14.45 JP2.18
RSB  (1 unrouted)
  Top 0.406: X3.P$3 61.59,50.42 61.85,50.16 90.55,50.16 91.06,50.67 U1.P$29
RSB1  (1 unrouted)
  Top 0.406: X11.P$3 61.59,3.43 61.85,3.17 90.55,3.17 91.06,3.68 U2.P$29
RUN  (1 unrouted)
  Top 0.406: X4.P$1 32.51,65.28 32.77,65.02 41.91,65.02 42.49,65.61 49.43,65.61 50.95,64.08 51.82,64.08 52.07,64.08 93.14,64.08 93.6,63.63 U1.P$30
RUN1  (1 unrouted)
  Top 0.406: X12.P$1 32.51,18.29 32.77,18.03 41.91,18.03 42.49,18.62 49.43,18.62 50.95,17.09 51.82,17.09 52.07,17.09 93.14,17.09 93.6,16.64 U2.P$30
SCL  (via drill 0.35)  (1 unrouted)
  Top 0.305: v96.87,69.98 90.42,69.98 88.72,71.68 v88.32,71.68 | v66.67,71.12 66.29,71.5 66.29,73.53 63.88,75.95 56.13,75.95 55.75,75.56 R2.2
  Top 0.406: R2.2 47.47,75.12 45.95,73.61 33.86,73.61 33.51,73.26 v31.75,73.26 | v29.11,73.26 18.82,73.26 17.15,74.93 9.78,74.93 8.64,73.79 8.64,66.17 8,65.53 X2.P$1
  Bottom 0.305: U1.32 98.68,69.09 97.79,69.98 v96.87,69.98 | v88.32,71.68 87.32,71.68 86.87,72.14 74.55,72.14 72.52,70.1 67.69,70.1 v66.67,71.12
  Bottom 0.406: v31.75,73.26 v29.11,73.26
SCL1  (via drill 0.35)  (1 unrouted)
  Top 0.305: v96.87,22.99 90.42,22.99 88.72,24.69 v88.32,24.69 | v66.67,24.13 66.29,24.51 66.29,26.54 63.88,28.96 56.13,28.96 55.75,28.57 R8.2
  Top 0.406: R8.2 47.47,28.13 45.95,26.62 33.86,26.62 33.51,26.27 v31.75,26.27 | v29.11,26.27 18.82,26.27 17.15,27.94 9.78,27.94 8.64,26.8 8.64,19.18 8,18.54 X10.P$1
  Bottom 0.305: U2.32 98.68,22.1 97.79,22.99 v96.87,22.99 | v88.32,24.69 87.32,24.69 86.87,25.15 74.55,25.15 72.52,23.11 67.69,23.11 v66.67,24.13
  Bottom 0.406: v31.75,26.27 v29.11,26.27
SDA  (via drill 0.35)  (1 unrouted)
  Top 0.406: X2.P$2 7.87,62.99 9.27,64.39 9.27,73.23 10.41,74.37 16.91,74.37 18.93,72.35 v29.08,72.35 | v31.7,72.35 31.87,72.53 33.56,72.53 34.06,73.03 46.16,73.03 47.53,74.39 53.37,74.39 53.85,73.91 57.66,73.91 57.91,74.17 | R1.2 57.91,74.17 | 57.91,74.17 58.17,73.91 62.99,73.91 64.26,72.64 v65.28,72.64 | v88.77,72.52 89.54,71.75 v92.58,71.75
  Bottom 0.406: v31.7,72.35 v29.08,72.35 | v65.28,72.64 88.65,72.64 v88.77,72.52 | v92.58,71.75 94.74,71.75 96.14,70.36 U1.31
SDA1  (via drill 0.35)  (1 unrouted)
  Top 0.406: X10.P$2 7.87,16 9.27,17.4 9.27,26.24 10.41,27.38 16.91,27.38 18.93,25.36 v29.08,25.36 | v31.83,25.35 32.01,25.53 33.56,25.53 34.06,26.03 46.16,26.03 47.53,27.4 53.37,27.4 53.85,26.92 57.66,26.92 57.91,27.18 | R7.2 57.91,27.18 | 57.91,27.18 58.17,26.92 62.99,26.92 64.26,25.65 v65.28,25.65 | v88.77,25.53 89.54,24.77 v92.58,24.77
  Bottom 0.406: v29.08,25.36 29.1,25.35 v31.83,25.35 | v65.28,25.65 88.65,25.65 v88.77,25.53 | v92.58,24.77 94.74,24.77 96.14,23.37 U2.31
SELECT  (via drill 0.35)
  Top 0.152: U1.P$7 U1.7
  Top 0.406: J4.4 78.59,90.02 80.01,91.44 102.11,91.44 102.74,90.8 v102.74,89.53 | v31.52,78.1 30.96,77.54 30.96,57.45 29.97,56.46 JP1.16
  Bottom 0.406: v102.74,89.53 102.74,82.8 103.76,81.79 U1.7 | v31.52,78.1 31.52,82.2 32.05,82.73 40.69,82.73 40.97,82.45 40.97,82.19 42.44,80.72 53.95,80.72 54.66,81.43 54.66,90.4 55.37,91.11 77.55,91.11 78.61,90.04 78.61,87.66 J4.4
SELECT1  (via drill 0.35)  (1 unrouted)
  Top 0.406: J7.4 78.59,43.03 80.01,44.45 102.11,44.45 102.74,43.81 v102.74,42.55 | v31.52,31.11 30.96,30.55 30.96,10.46 29.97,9.47 JP2.16
  Bottom 0.406: v102.74,42.55 102.74,35.81 103.76,34.8 U2.7 | v31.52,31.11 31.52,35.21 32.05,35.74 40.69,35.74 40.97,35.46 40.97,35.2 42.44,33.73 53.95,33.73 54.66,34.44 54.66,43.41 55.37,44.12 77.55,44.12 78.61,43.05 78.61,40.66 J7.4
SETTINGS  (1 unrouted)
  Top 0.406: U1.P$34 103.76,62.99 102.11,64.64 51.18,64.64 49.66,66.17 X4.P$4
SETTINGS1  (1 unrouted)
  Top 0.406: U2.P$34 103.76,16 102.11,17.65 51.18,17.65 49.66,19.18 X12.P$4
START  (via drill 0.35)
  Top 0.152: U1.P$9 U1.9
  Top 0.406: J4.5 83.67,90.02 84.53,90.88 97.41,90.88 97.92,90.37 v97.92,87.5 | JP1.14 27.43,55.5 29.84,57.91 v29.84,78.61
  Bottom 0.406: v97.92,87.5 97.92,85.09 98.68,84.33 U1.9 | J4.5 83.67,90.93 82.93,91.67 54.36,91.67 54.1,91.41 54.1,81.66 53.72,81.28 42.67,81.28 41.53,82.42 41.53,82.68 40.89,83.31 37.59,83.31 36.96,83.95 30.61,83.95 29.84,83.19 v29.84,78.61
START1  (via drill 0.35)  (1 unrouted)
  Top 0.406: J7.5 83.67,43.03 84.53,43.89 97.41,43.89 97.92,43.38 v97.92,40.51 | JP2.14 27.43,8.51 29.84,10.92 v29.84,31.62
  Bottom 0.406: v97.92,40.51 97.92,38.1 98.68,37.34 U2.9 | J7.5 83.67,43.94 82.93,44.68 54.36,44.68 54.1,44.42 54.1,34.67 53.72,34.29 42.67,34.29 41.53,35.43 41.53,35.69 40.89,36.32 37.59,36.32 36.96,36.96 30.61,36.96 29.84,36.2 v29.84,31.62
SWCLK  (1 unrouted)
  Top 0.406: X1.P$2 34.8,78.49 35.18,78.87 54.4,78.87 55.01,79.48 65.08,79.48 65.56,78.99 65.56,76.5 67.48,74.57 72.82,74.57 74.24,73.15 74.24,71.75 73.86,71.37 U1.41
SWCLK1  (1 unrouted)
  Top 0.406: X9.P$2 34.8,31.5 35.18,31.88 54.4,31.88 55.01,32.49 65.08,32.49 65.56,32 65.56,29.51 67.48,27.58 72.82,27.58 74.24,26.16 74.24,24.77 73.86,24.38 U2.41
SWDIO  (1 unrouted)
  Top 0.406: X1.P$1 32.26,78.74 32.94,79.43 54.17,79.43 54.78,80.03 65.58,80.03 66.12,79.5 66.12,76.73 67.71,75.13 73.46,75.13 74.8,73.79 74.8,66.8 74.17,66.17 71.1,66.17 U1.43
SWDIO1  (1 unrouted)
  Top 0.406: X9.P$1 32.26,31.75 32.94,32.44 54.17,32.44 54.78,33.05 65.58,33.05 66.12,32.51 66.12,29.74 67.71,28.14 73.46,28.14 74.8,26.8 74.8,19.81 74.17,19.18 71.1,19.18 U2.43
TP  (via drill 0.35)  (1 unrouted)
  Top 0.406: X3.P$1 56.52,50.29 57.91,48.89 82.04,48.89 v82.55,48.38
  Bottom 0.406: v82.55,48.38 83.18,48.38 83.44,48.64 U1.26
TP1  (via drill 0.35)  (1 unrouted)
  Top 0.406: X11.P$1 56.52,3.3 57.91,1.9 82.04,1.9 v82.55,1.39
  Bottom 0.406: v82.55,1.39 83.18,1.39 83.44,1.65 U2.26
UP  (via drill 0.35)  (1 unrouted)
  Top 0.406: U1.P$2 116.46,83.13 116.2,83.39 105.18,83.39 104.56,84.01 104.56,85.31 102.23,87.63 J5.3 | v112.27,74.04 115.82,74.04 116.46,74.68 U1.2
  Bottom 0.406: JP1.20 35.05,61.21 35.79,61.95 46.1,61.95 46.36,61.95 88.07,61.95 91.21,65.09 91.21,72.77 91.57,73.13 105.98,73.13 106.91,74.06 112.25,74.06 v112.27,74.04
UP1  (via drill 0.35)  (1 unrouted)
  Top 0.406: U2.P$2 116.46,36.14 116.2,36.4 105.18,36.4 104.56,37.02 104.56,38.32 102.23,40.64 J8.3 | v112.27,27.05 115.82,27.05 116.46,27.69 U2.2
  Bottom 0.406: JP2.20 35.05,14.22 35.79,14.96 46.1,14.96 46.36,14.96 88.07,14.96 91.21,18.1 91.21,25.78 91.57,26.14 105.98,26.14 106.91,27.07 112.25,27.07 v112.27,27.05
VSYS
  Top 0.406: U1.P$39 U1.39
VSYS1  (1 unrouted)

## Text on the board
tPlace: 1K | 2K | 3K | 4K | GND | 1P | 2P | 3P | 4P | GND | GND | GND | SELECT | 5V | DOWN | UP | LEFT | RIGHT | HOME | START | RGB | GND | 5V | 5V | 3V3 | GND | GND | SWDIO | SWCLK | SCL | SDA | GND | 3V3 | RUN | GND | GND | SETTINGS | GND | PL1 | PL4 | TP | LSB | RSB | GND | 5V | PL2 | PL3 | UP | 5V | DOWN | 1K | 2K | 3K | 4K | GND | 1P | 2P | 3P | 4P | GND | GND | GND | SELECT | 5V | DOWN | UP | LEFT | RIGHT | HOME | START | RGB | GND | 5V | 3V3 | 5V | GND | GND | SWDIO | SWCLK | SCL | SDA | GND | 3V3 | RUN | GND | GND | SETTINGS | GND | PL1 | PL2 | PL3 | PL4 | TP | LSB | RSB | GND | 5V | UP | 5V | DOWN